# EAGLE board Assignment (EAGLE 9.5.2)
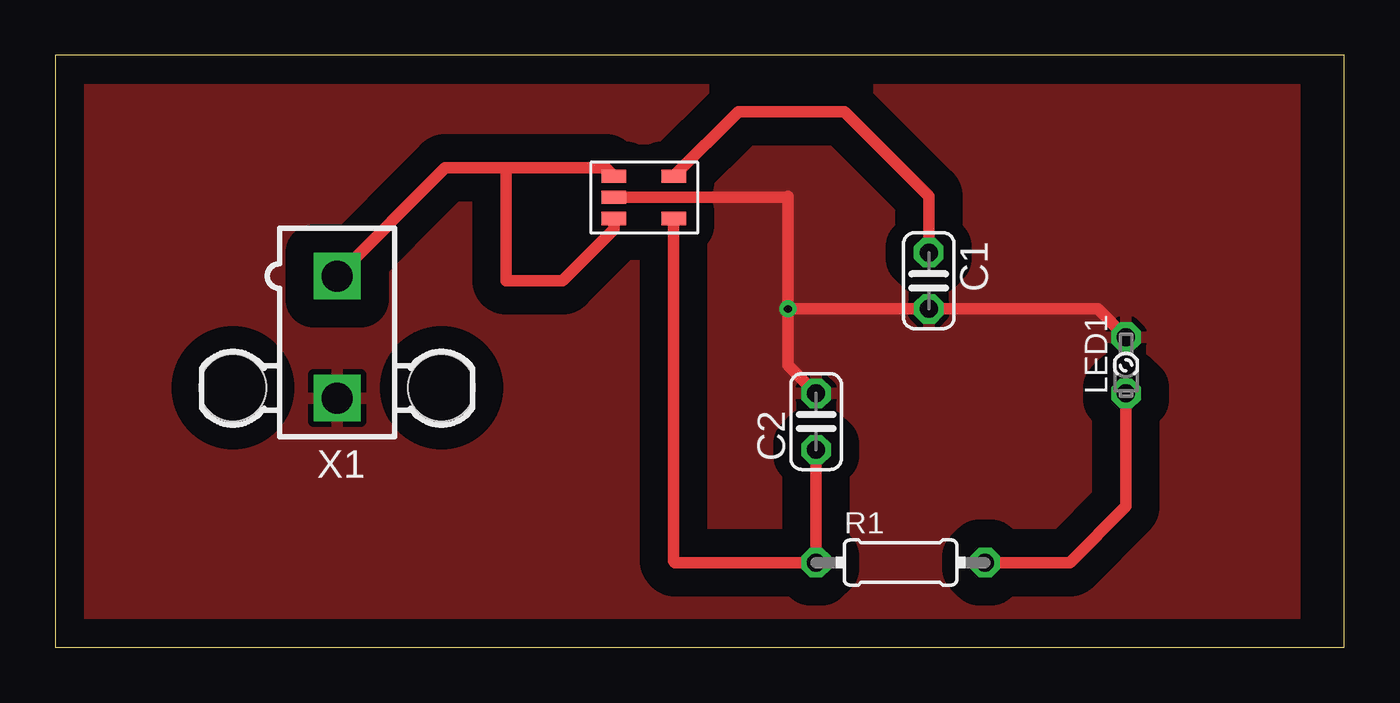
[diagram p0: board, top side]
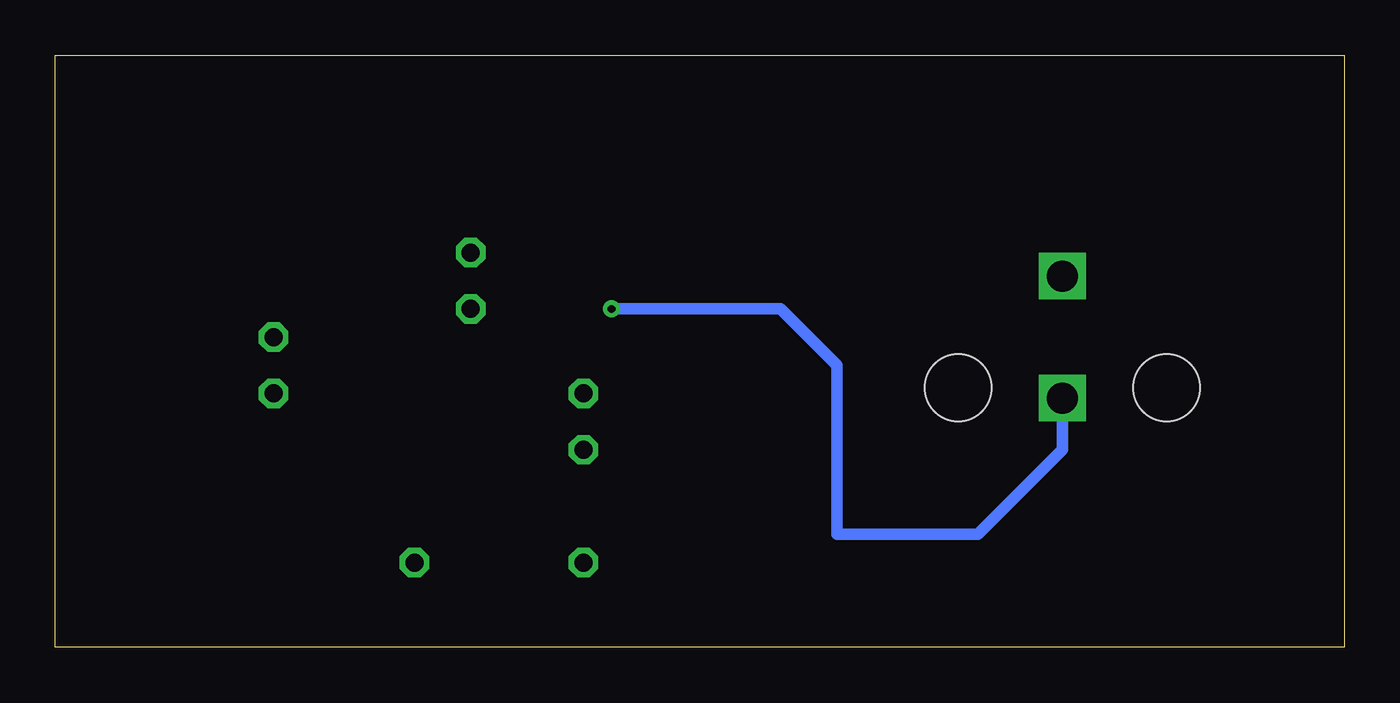
[diagram p1: board, bottom side, seen from below]

Size 58.09 x 26.66 mm. Coordinates in mm from the lower left corner, seen from the top.
Outline: 0,0 58.09,0 58.09,26.66 0,26.66 0,0
Copper layers (1*16): Top 0.035mm / dielectric 1.5mm / Bottom 0.035mm
Design rules "default": minimum track width 6mil, minimum drill 0.35mm, track to track 6mil, track to pad 6mil, pad to pad 6mil, via to via 6mil, smd to smd 6mil, copper to edge 40mil, drill to drill 6mil, minimum pad ring 10mil, minimum via ring 8mil, stop-mask expansion 4mil, vias tented up to drill 0mil, thermal gap 10mil

## Footprints (pad centres in the part's own frame; a part is rotated, then mirrored left to right if it is on the bottom)
C025-024X044 = drill 0.813 octagon: 1 -1.27,0; 2 1.27,0
LSU260 = drill 0.813 octagon: A -1.27,0; K 1.27,0
0204/7 = drill 0.813 octagon: 1 -3.81,0; 2 3.81,0
TPS799 = smd 1.1 x 0.6: 1 -1.5,0.9; 2 -1.5,-0.05; 3 -1.5,-1; 4 1.2,0.9; 5 1.2,-1
5566-2 = drill 1.4 square: 1 0,-2.75; 2 0,2.75 | hole 3: 4.7,2.29; -4.7,2.29

## Placement (x,y rotation side)
C1  [C025-024X044]  39.37,16.51 270 top
C2  [C025-024X044]  34.29,10.16 90 top
LED1  [LSU260]  48.26,12.7 90 top
R1  [0204/7]  38.1,3.81 0 top
U$2  TPS799  [TPS799]  26.67,20.32 0 top
X1  5566-2  [5566-2]  12.7,13.97 180 top

## Library data of the parts
C1 C2 = rcl; SPICEPREFIX: C
LED1 = led
R1 = rcl; SPICEPREFIX: R
U$2 = TPS799
X1 = con-molex; MF: MOLEX; OC_FARNELL: 1822072; OC_NEWARK: unknown

## Nets
GND: C1.2 C2.2 LED1.K U$2.2 X1.2
N$1: C1.1 U$2.4
N$2: C2.1 R1.1 U$2.5
N$3: LED1.A R1.2
N$4: U$2.1 U$2.3 X1.1

## Tracks (layer width: path | path; a pad name or v marks a point on that pad's centre or on a via)
GND  (via drill 0.35)
  Top 0.508: LED1.K 46.99,15.24 C1.2 v33.02,15.24 | U$2.2 32.97,20.27 33.02,20.32 v33.02,15.24 | C2.2 33.02,12.7 v33.02,15.24
  Bottom 0.508: v33.02,15.24 25.4,15.24 22.86,12.7 22.86,5.08 16.51,5.08 12.7,8.89 X1.2
  pour Top (isolate 1.27): 1.27,25.4 1.27,1.27 55.88,1.27 55.88,25.4
N$1
  Top 0.508: U$2.4 30.78,24.13 35.56,24.13 39.37,20.32 C1.1
N$2
  Top 0.508: U$2.5 27.87,3.88 27.94,3.81 R1.1 C2.1
N$3
  Top 0.508: LED1.A 48.26,6.35 45.72,3.81 R1.2
N$4
  Top 0.508: U$2.1 24.8,21.59 20.32,21.59 | X1.1 17.57,21.59 20.32,21.59 | 20.32,21.59 20.32,16.51 22.86,16.51 25.17,18.82 U$2.3